# EAGLE board Board (EAGLE 9.3.0)
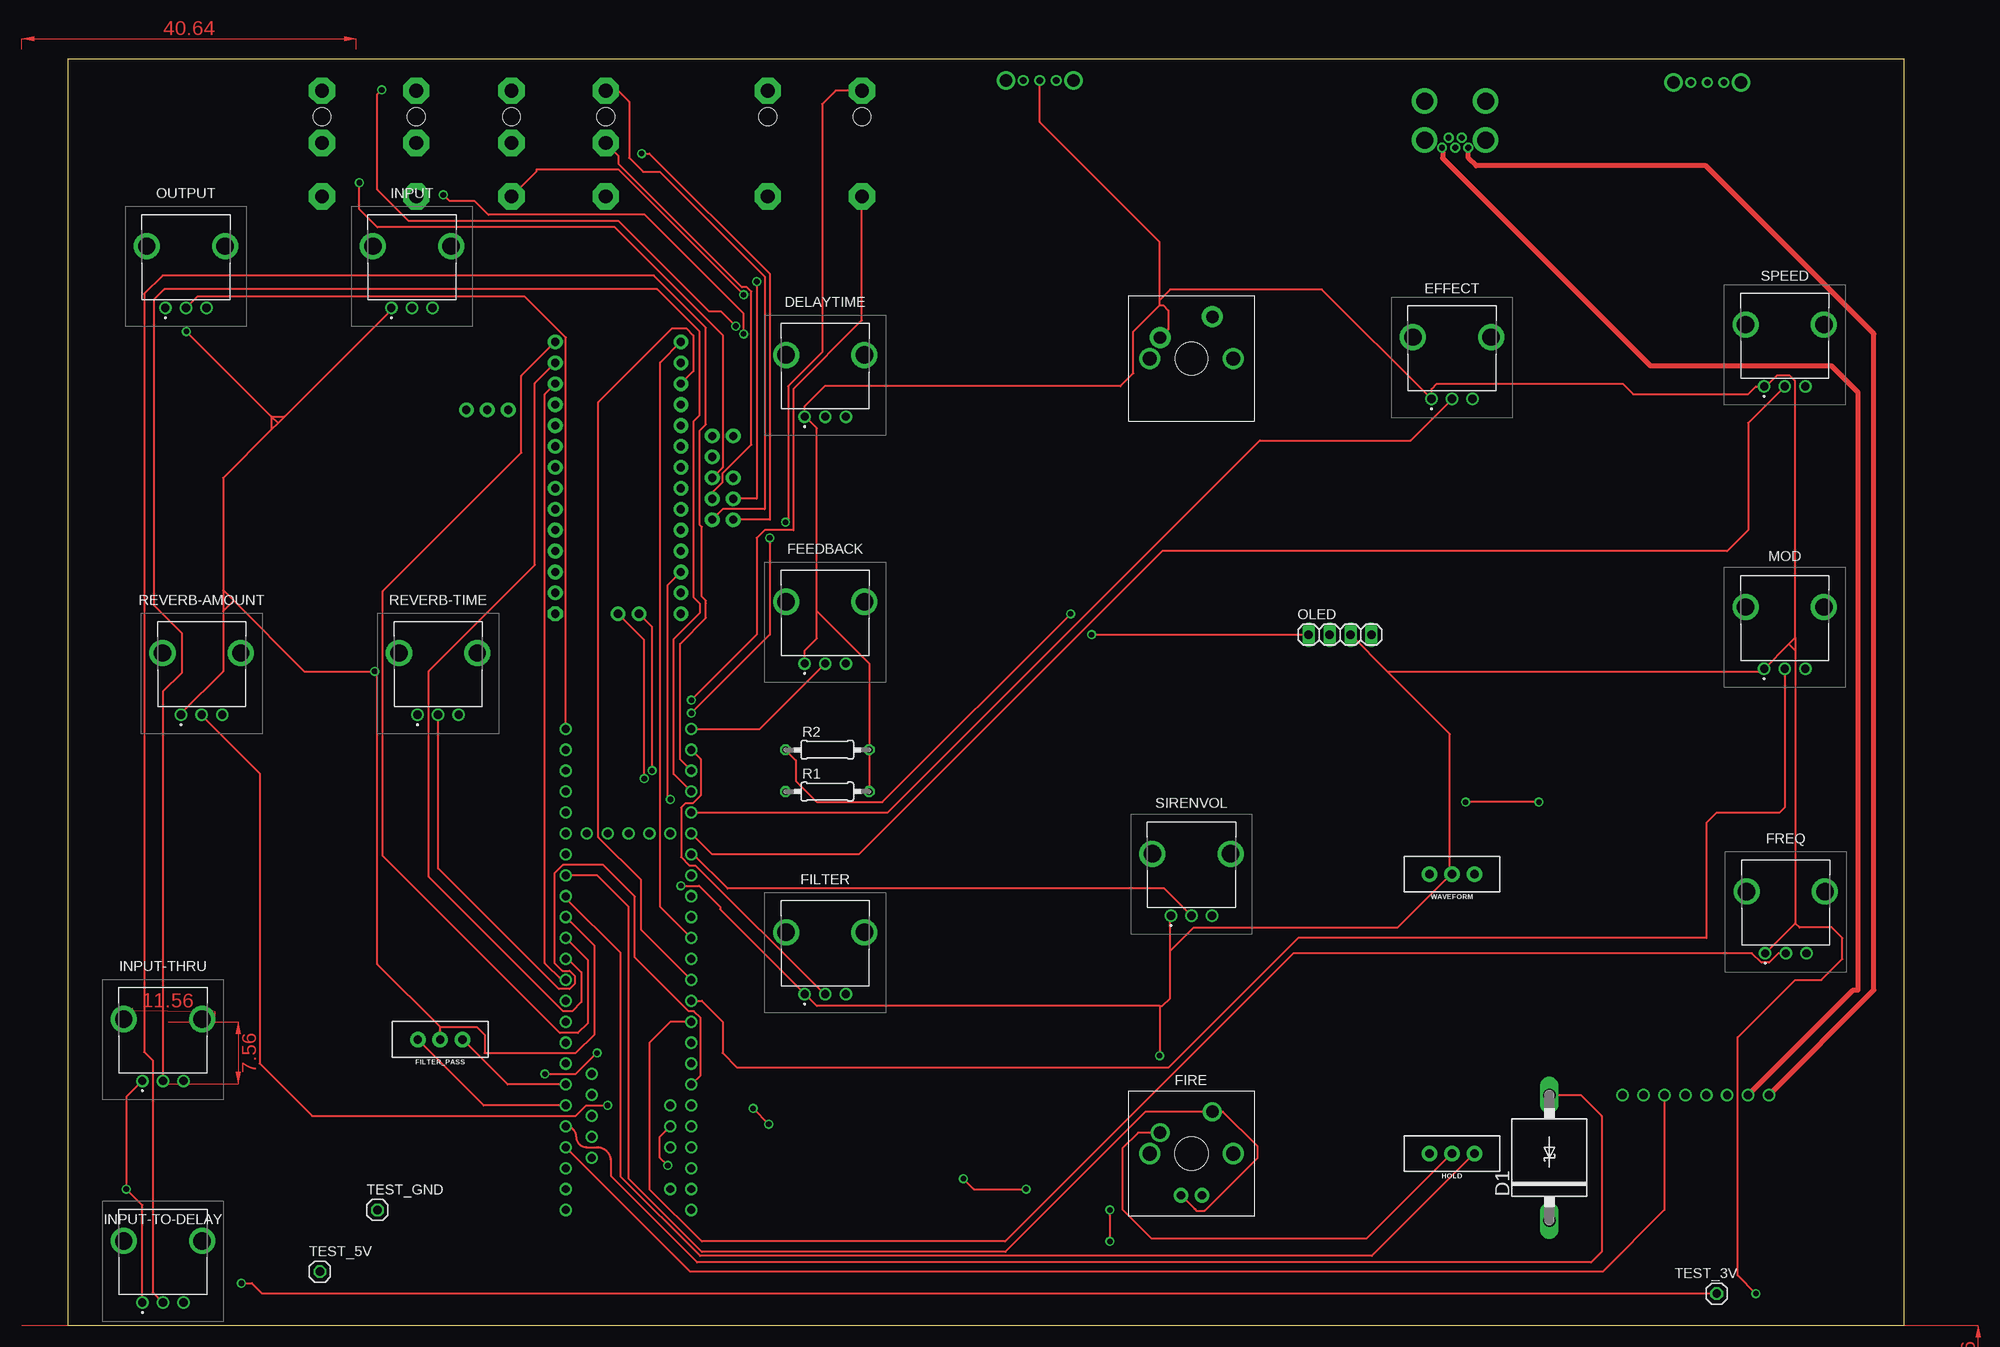
[diagram p0: board, top side]
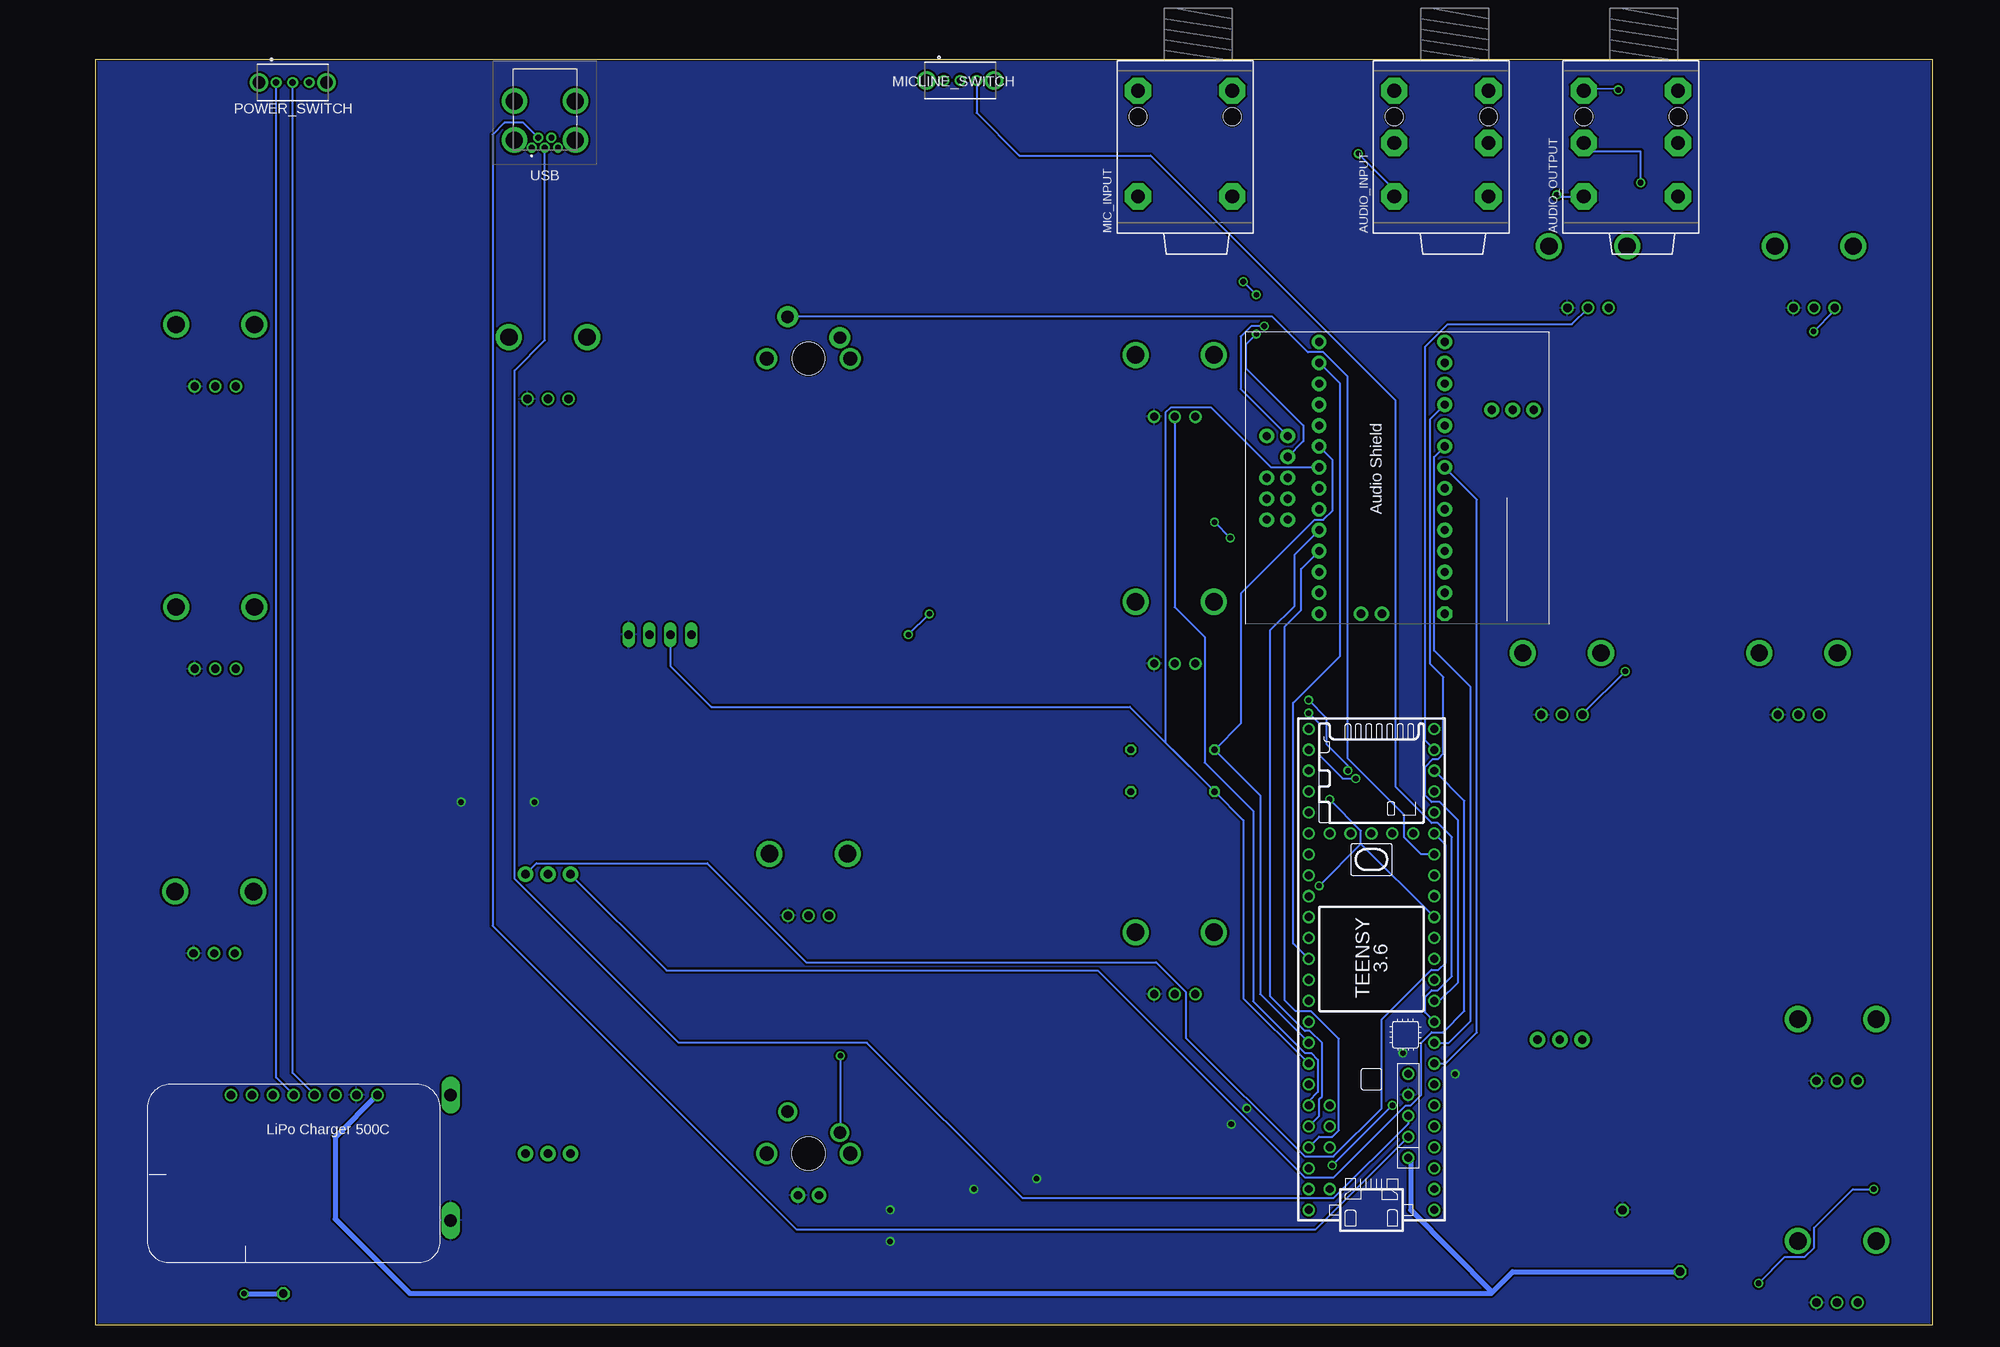
[diagram p1: board, bottom side, seen from below]

Size 222.88 x 153.67 mm. Coordinates in mm from the lower left corner, seen from the top.
Outline: 0,0 222.88,0 222.88,153.67 0,153.67 0,0
Copper layers (1*16): Top 0.035mm / dielectric 1.5mm / Bottom 0.035mm
Design rules "default *": minimum track width 3.5mil, minimum drill 0.2mm, track to track 5mil, track to pad 5mil, pad to pad 5mil, via to via 5mil, smd to smd 5mil, copper to edge 0.2mm, drill to drill 6mil, minimum pad ring 10mil, minimum via ring 8mil, stop-mask expansion 4mil, vias tented up to drill 0mil, thermal gap 10mil
Net classes: 0 default: width 0.254 mm, drill 0.686 mm, clearance 0.254 mm

## Footprints (pad centres in the part's own frame; a part is rotated, then mirrored left to right if it is on the bottom)
NRJ6HF = drill 1.676 pad 3.175 octagon: RING 2.055,7.25; RING-S 2.055,-4.18; SLEEVE 8.414,7.25; SLEEVE-S 8.414,-4.18; TIP -4.445,7.25; TIP-S -4.445,-4.18 | hole 2.184: 5.239,7.25; 5.239,-4.18
P6T15 = drill 1.499 long: A 7.62,0; C -7.62,0
RK09L1140A66 = drill 1 pad 1.5: 1 -2.5,-5.025; 2 0,-5.025; 3 2.5,-5.025 | drill 2.11 pad 3.164: 4 -4.75,2.475; 5 4.75,2.475
SWITCH_SPDT_PTH_11.6X4.0MM_LOCK = drill 1.016 pad 1.88: 1 0,2.718; 2 0,0; 3 0,-2.718
CHERRY-MX-LED = drill 1.016 pad 1.778: LED+ -1.27,-5.08; LED- 1.27,-5.08 | drill 1.714 pad 1.93: P$3 -5.08,0; P$4 5.08,0 | drill 1.524 pad 2.286: SW1 -3.81,2.54; SW2 2.54,5.08 | hole 4.064: 0,0
NRJ4HF = drill 1.676 pad 3.175 octagon: SLEEVE 8.414,7.25; SLEEVE-S 8.414,-4.18; TIP -4.445,7.25; TIP-S -4.445,-4.18 | hole 2.184: 5.239,7.25; 5.239,-4.18
OS102011MA1QN1 = drill 0.8 pad 1.3: 1 -2,0; 2 0,0; 3 2,0 | drill 1.5 pad 2.25: 4 -4.1,0; 5 4.1,0
1X04 = drill 1.016 long: 1 -3.81,0; 2 -1.27,0; 3 1.27,0; 4 3.81,0
0207/10 = drill 0.813 octagon: 1 -5.08,0; 2 5.08,0
CHERRY-MX = drill 1.714 pad 1.93: P$3 -5.08,0; P$4 5.08,0 | drill 1.5 pad 2.54: SW1 -3.81,2.54; SW2 2.54,5.08 | hole 4: 0,0
TEENSY_3.5/3.6 = drill 0.965: 0/RX -25.4,-7.62; 1/TX -22.86,-7.62; 2 -20.32,-7.62; 3/CANTX -17.78,-7.62; 3V3 7.62,-7.62; 3V3_2 17.78,-2.54; 3V3_LO -22.86,7.62; 4/CANRX -15.24,-7.62; 5 -12.7,-7.62; 6 -10.16,-7.62; 7 -7.62,-7.62; 8 -5.08,-7.62; 9/CS -2.54,-7.62; 10/CS 0,-7.62; 11/MOSI 2.54,-7.62; 12/MISO 5.08,-7.62; 13/SCK 5.08,7.62; 14/A0 2.54,7.62; 15/A1 0,7.62; 16/A2 -2.54,7.62; 17/A3 -5.08,7.62; 18/A4/SDA -7.62,7.62; 19/A5/SCL -10.16,7.62; 20/A6 -12.7,7.62; 21/A7 -15.24,7.62; 21/DAC0 12.7,7.62; 22/A8 -17.78,7.62; 23/A9 -20.32,7.62; 24 10.16,-7.62; 25 12.7,-7.62; 26 15.24,-7.62; 27 17.78,-7.62; 28 20.32,-7.62; 29 22.86,-7.62; 30 25.4,-7.62; 31/A12 27.94,-7.62; 32/A13 30.48,-7.62; 33/A14 30.48,7.62; 34/A15 27.94,7.62; 35/A16 25.4,7.62; 36/A17 22.86,7.62; 37/A18 20.32,7.62; 38/A19 17.78,7.62; 39/A20 15.24,7.62; A10 -17.78,5.08; A11 -15.24,5.08; A22/DAC1 10.16,7.62; AGND -25.4,7.62; AREF -20.32,5.08; GND -27.94,-7.62; GND2 7.62,7.62; GND3 17.78,0; PROG 17.78,2.54; RESET 17.78,5.08; U5V -21.59,-4.445; UD+ -16.51,-4.445; UD- -19.05,-4.445; UGND1 -13.97,-4.445; UGND2 -11.43,-4.445; VBAT 17.78,-5.08; VIN -27.94,7.62; VUSB -25.4,5.08
1X01 = drill 1.016 octagon: 1 0,0
POWERBOOST500 = drill 1.016: 1 10.16,20.32; 2 12.7,20.32; 3 15.24,20.32; 4 17.78,20.32; 5 20.32,20.32; 6 22.86,20.32; 7 25.4,20.32; 8 27.94,20.32
AUDIOSHIELD = drill 1 pad 1.778: 0 -13.97,-5.08; 1 -11.43,-5.08; 2 -8.89,-5.08; 3 -6.35,-5.08; 3V -11.43,10.16; 4 -3.81,-5.08; 5 -1.27,-5.08; 5V -16.51,10.16; 6 1.27,-5.08; 7 3.81,-5.08; 8 6.35,-5.08; 9 8.89,-5.08; 10 11.43,-5.08; 11 13.97,-5.08; 12 16.51,-5.08; 13 16.51,10.16; 14 13.97,10.16; 15 11.43,10.16; 16 8.89,10.16; 17 6.35,10.16; 18 3.81,10.16; 19 1.27,10.16; 20 -1.27,10.16; 21 -3.81,10.16; 22 -6.35,10.16; 23 -8.89,10.16; G -13.97,10.16; GND_MIC -16.51,2.54; INGND1 -5.08,16.51; INGND2 -2.54,16.51; INL -5.08,13.97; INR -2.54,13.97; MIC -16.51,5.08; OUTGND 2.54,13.97; OUTL 5.08,13.97; OUTR 0,13.97; UNUSED1 0,16.51; UNUSED2 5.08,16.51; VOL 8.255,-13.335; VOL_3.3V 8.255,-15.875; VOL_GND 8.255,-10.795 | drill 1 pad 1.778 octagon: GND -16.51,-5.08
XM7D0512 = drill 0.7 pad 1.2: 1 -1.6,-4.225; 2 -0.8,-3.025; 3 0,-4.225; 4 0.8,-3.025; 5 1.6,-4.225 | drill 2.062 pad 3.092: 6 -3.7,-3.325; 7 3.7,-3.325; 8 -3.7,1.425; 9 3.7,1.425

## Placement (x,y rotation side)
AUDIO_INPUT  NRJ6HF  [NRJ6HF]  58.04,141.48 90 bottom
AUDIO_OUTPUT  NRJ6HF  [NRJ6HF]  35.05,141.48 90 bottom
D1  5KPXX  [P6T15]  179.83,20.32 90 top
DELAYTIME  RK09L1140A66  [RK09L1140A66]  91.95,115.32 0 top
EFFECT  RK09L1140A66  [RK09L1140A66]  168.02,117.47 0 top
FEEDBACK  RK09L1140A66  [RK09L1140A66]  91.95,85.34 0 top
FILTER  RK09L1140A66  [RK09L1140A66]  91.95,45.21 0 top
FILTER_PASS  [SWITCH_SPDT_PTH_11.6X4.0MM_LOCK]  45.21,34.67 90 top
FIRE  CHERRY-MX-LED  [CHERRY-MX-LED]  136.4,20.83 0 top
FREQ  RK09L1140A66  [RK09L1140A66]  208.53,50.16 0 top
HOLD  [SWITCH_SPDT_PTH_11.6X4.0MM_LOCK]  168.02,20.83 90 top
INPUT  RK09L1140A66  [RK09L1140A66]  41.78,128.52 0 top
INPUT-THRU  RK09L1140A66  [RK09L1140A66]  11.56,34.67 0 top
INPUT-TO-DELAY  RK09L1140A66  [RK09L1140A66]  11.56,7.75 0 top
MIC_INPUT  NRJ4HF  [NRJ4HF]  89.15,141.48 90 bottom
MICLINE_SWITCH  OS102011MA1QN1  [OS102011MA1QN1]  117.98,151.13 0 bottom
MOD  RK09L1140A66  [RK09L1140A66]  208.41,84.71 0 top
OLED  [1X04]  154.43,83.82 0 top
OUTPUT  RK09L1140A66  [RK09L1140A66]  14.35,128.52 0 top
POWER_SWITCH  OS102011MA1QN1  [OS102011MA1QN1]  199.01,150.88 0 bottom
R1  [0207/10]  92.2,64.77 0 top
R2  [0207/10]  92.2,69.85 0 top
REVERB-AMOUNT  RK09L1140A66  [RK09L1140A66]  16.26,79.12 0 top
REVERB-TIME  RK09L1140A66  [RK09L1140A66]  44.96,79.12 0 top
SIRENVOL  RK09L1140A66  [RK09L1140A66]  136.4,54.74 0 top
SOUND  CHERRY-MX  [CHERRY-MX]  136.4,117.35 0 top
SPEED  RK09L1140A66  [RK09L1140A66]  208.41,119 0 top
TEENSY  TEENSY_3.5/3.6  [TEENSY_3.5/3.6]  68.07,41.91 90 bottom
TEST_3V  [1X01]  200.15,3.81 0 top
TEST_5V  [1X01]  30.61,6.48 0 top
TEST_GND  [1X01]  37.59,13.97 0 top
U$2  POWERBOOST500C  [POWERBOOST500]  216.66,7.62 0 bottom
U$5  [AUDIOSHIELD]  64.26,102.87 90 bottom
USB  XM7D-0512  [XM7D0512]  168.4,147.19 0 bottom
WAVEFORM  [SWITCH_SPDT_PTH_11.6X4.0MM_LOCK]  168.02,54.74 90 top

## Library data of the parts
AUDIO_INPUT AUDIO_OUTPUT MIC_INPUT = audio
D1 = diode
DELAYTIME EFFECT FEEDBACK FILTER FREQ INPUT INPUT-THRU INPUT-TO-DELAY MOD OUTPUT REVERB-AMOUNT REVERB-TIME SIRENVOL SPEED = SamacSys_Parts; DESCRIPTION: Audio potentiometer 10K Vertical 12,5mm; HEIGHT: 22mm; MANUFACTURER_NAME: ALPS; MANUFACTURER_PART_NUMBER: RK09L1140A66; MOUSER_PART_NUMBER: 688-RK09L1140A66
FILTER_PASS HOLD WAVEFORM = SparkFun-Switches; PROD_ID: SWCH-08261; SF_SKU: COM-00102
FIRE SOUND = cherrymx
MICLINE_SWITCH POWER_SWITCH = OS102011MA1QN1; ALLIED_NUMBER: 70128246; ALLIED_PRICE-STOCK: https://www.alliedelec.com/c-k-os102011ma1qn1/70128246/; DESCRIPTION: Switch Slide Right Angle SPDT 0.1A 12VDC Through Hole Slide Switch SPDT On-On 0.1 A@ 12 V dc Slide; HEIGHT: mm; MANUFACTURER_NAME: C & K COMPONENTS; MANUFACTURER_PART_NUMBER: OS102011MA1QN1; MOUSER_PART_NUMBER: 611-OS102011MA1QN1; MOUSER_PRICE-STOCK: https://www.mouser.com/Search/Refine.aspx?Keyword=611-OS102011MA1QN1; RS_PART_NUMBER: 7874855; RS_PRICE-STOCK: http://uk.rs-online.com/web/p/products/7874855
OLED TEST_3V TEST_5V TEST_GND = pinhead
R1 R2 = resistor
TEENSY = Teensy356
U$2 = jos-ph
U$5 = Teensy_Audioshield
USB = SamacSys_Parts; DESCRIPTION: OMRON ELECTRONIC COMPONENTS - XM7D-0512 - MINI USB, 2.0 TYPE B, RECEPTACLE, TH; HEIGHT: 3mm; MANUFACTURER_NAME: Omron Electronics; MANUFACTURER_PART_NUMBER: XM7D-0512; MOUSER_PART_NUMBER: 653-XM7D-0512

## Nets
3V: TEENSY.3V3_LO
BUTTON_FIRE: FIRE.LED+ FIRE.SW2 TEENSY.25
BUTTON_HOLD: HOLD.3 TEENSY.24
BUTTON_SOUND: SOUND.SW2 TEENSY.26
GND: D1.C DELAYTIME.3 EFFECT.3 FEEDBACK.3 FILTER.3 FIRE.LED- FREQ.3 INPUT-THRU.3 INPUT-TO-DELAY.3 INPUT.3 MOD.3 OLED.4 OUTPUT.3 REVERB-AMOUNT.3 REVERB-TIME.3 SIRENVOL.3 SPEED.3 TEENSY.UGND1 TEST_GND.1 U$2.7
KNOB_DELAY: DELAYTIME.2 TEENSY.21/A7
KNOB_EFFECT: EFFECT.2 TEENSY.37/A18
KNOB_FEEDBACK: FEEDBACK.2 TEENSY.33/A14
KNOB_FILTER: FILTER.2 TEENSY.34/A15
KNOB_FREQ: FREQ.2 TEENSY.17/A3
KNOB_INPUT: INPUT.2 TEENSY.31/A12
KNOB_INPUTTHRU: INPUT-THRU.2 TEENSY.36/A17
KNOB_INPUTTODELAY: INPUT-TO-DELAY.2 TEENSY.35/A16
KNOB_MOD: MOD.2 TEENSY.16/A2
KNOB_OUTPUT: OUTPUT.2 TEENSY.32/A13
KNOB_REVERBTIME: REVERB-TIME.2 TEENSY.20/A6
KNOB_REVERBVOLUME: REVERB-AMOUNT.2 TEENSY.A10
KNOB_SIRENVOL: SIRENVOL.2 TEENSY.39/A20
KNOB_SPEED: SPEED.2 TEENSY.38/A19
LED_HOLD: D1.A TEENSY.3/CANTX
N$1: U$2.1 USB.1
N$2: U$2.2 USB.5
N$3: TEENSY.UD- USB.2
N$4: TEENSY.UD+ USB.3
N$5: MIC_INPUT.SLEEVE U$5.GND_MIC
N$6: MIC_INPUT.TIP U$5.MIC
N$8: AUDIO_OUTPUT.TIP U$5.OUTGND
N$9: AUDIO_INPUT.SLEEVE U$5.INL
N$10: AUDIO_OUTPUT.RING U$5.OUTR
N$11: AUDIO_INPUT.TIP U$5.INGND1
N$12: AUDIO_INPUT.TIP-S U$5.INGND2
N$13: AUDIO_INPUT.RING U$5.INR
N$14: AUDIO_OUTPUT.SLEEVE U$5.OUTL
N$15: TEENSY.2 U$2.6
N$16: POWER_SWITCH.1 U$2.4
N$17: POWER_SWITCH.2 U$2.5
PIN4: FILTER_PASS.1 TEENSY.4/CANRX
PIN5: FILTER_PASS.3 TEENSY.5
PIN6: TEENSY.6 U$5.6
PIN7: TEENSY.7 U$5.7
PIN8: MICLINE_SWITCH.3 TEENSY.8
PIN9: TEENSY.9/CS U$5.9
PIN10: TEENSY.10/CS U$5.10
PIN11: TEENSY.11/MOSI U$5.11
PIN12: TEENSY.12/MISO U$5.12
PIN13: TEENSY.13/SCK U$5.13
PIN14: TEENSY.14/A0 U$5.14
PIN15: TEENSY.15/A1 U$5.15
PIN22: TEENSY.22/A8 U$5.22
PIN23: TEENSY.23/A9 U$5.23
PIN27: TEENSY.27 WAVEFORM.3
PIN30: TEENSY.30 WAVEFORM.1
SCL: OLED.2 R1.1 TEENSY.19/A5/SCL U$5.19
SDA: OLED.1 R2.1 TEENSY.18/A4/SDA U$5.18
TEENSY_GND: TEENSY.GND
TEST_5V: TEENSY.U5V TEST_5V.1 U$2.8
VCC: DELAYTIME.1 EFFECT.1 FEEDBACK.1 FILTER.1 FILTER_PASS.2 FIRE.SW1 FREQ.1 HOLD.2 INPUT-THRU.1 INPUT-TO-DELAY.1 INPUT.1 MICLINE_SWITCH.2 MOD.1 OLED.3 OUTPUT.1 R1.2 R2.2 REVERB-AMOUNT.1 REVERB-TIME.1 SIRENVOL.1 SOUND.SW1 SPEED.1 TEENSY.3V3 TEST_3V.1 U$5.3V WAVEFORM.2

## Tracks (layer width: path | path; a pad name or v marks a point on that pad's centre or on a via)
BUTTON_FIRE
  Top 0.254: FIRE.LED+ 136.78,14.1 136.98,13.9 137.99,13.9 144.41,20.32 144.41,21.7 140.21,25.91 FIRE.SW2 130.81,25.91 113.8,8.89 76.96,8.89 68.07,17.78 68.07,50.8 64.26,54.61 TEENSY.25
BUTTON_HOLD
  Top 0.254: HOLD.3 158.29,8.38 76.75,8.38 67.11,18.03 67.11,45.16 60.45,51.82 TEENSY.24
BUTTON_SOUND
  Bottom 0.254: TEENSY.26 62.03,57.15 64.11,59.23 64.11,61.94 70.97,68.8 70.97,115.19 73.9,118.11 75.78,118.11 80.1,122.43 SOUND.SW2
GND  (via drill 0.69)
  Top 0.254: v108.71,17.78 109.98,16.51 v116.33,16.51 | v83.19,26.29 v85.09,24.38 | v57.91,30.48 57.94,30.5 61.68,30.5 64.19,33.02 v64.26,33.02 | v126.49,13.97 v126.49,10.16 | v178.56,63.5 v169.67,63.5
  pour Bottom: -0.51,156.21 220.47,156.21 226.82,149.86 226.82,-7.62 2.03,-7.62 -3.05,-2.54 -3.05,143.51 -4.32,144.78 -4.32,152.4
KNOB_DELAY
  Bottom 0.254: TEENSY.21/A7 75.69,27.17 74.57,28.29 74.57,32.21 75.38,33.02 76.15,33.02 82.44,39.31 82.44,62.42 88.31,68.3 88.31,83.54 91.95,87.18 DELAYTIME.2
KNOB_EFFECT
  Top 0.254: TEENSY.37/A18 99.53,62.23 144.71,107.42 162.99,107.42 EFFECT.2
KNOB_FEEDBACK
  Top 0.254: TEENSY.33/A14 84.02,72.39 FEEDBACK.2
KNOB_FILTER
  Top 0.254: TEENSY.34/A15 76.81,68.73 76.81,64.31 75.85,63.35 74.97,63.35 74.45,62.82 74.45,56.81 75.46,55.8 76.18,55.8 91.8,40.19 FILTER.2
KNOB_FREQ
  Top 0.254: FREQ.2 207.64,45.14 206.5,44.01 205.56,44.01 204.43,45.14 148.77,45.14 113.79,10.16 76.96,10.16 70.61,16.51 70.61,34.29 73.15,36.83 TEENSY.17/A3
KNOB_INPUT
  Bottom 0.254: TEENSY.31/A12 61.57,70.97 61.57,118.79 58.83,121.52 43.76,121.52 INPUT.2
KNOB_INPUTTHRU
  Top 0.254: TEENSY.36/A17 73.56,66.9 73.56,83.28 76.71,86.43 76.71,87.63 75.95,88.39 75.95,109.73 76.71,110.49 76.71,120.62 71.56,125.78 11.72,125.78 10.42,124.48 10.42,87.43 13.85,84 13.85,79.19 11.56,76.9 INPUT-THRU.2
KNOB_INPUTTODELAY
  Top 0.254: TEENSY.35/A16 74.32,68.68 74.32,82.71 77.47,85.86 77.47,87.63 | INPUT-TO-DELAY.2 10.31,3.97 10.31,32.14 9.29,33.16 9.29,125.21 11.51,127.43 71.13,127.43 77.47,121.09 77.47,109.34 76.71,108.58 76.71,97.16 76.96,96.91 76.96,88.45 77.47,87.95 77.47,87.63 | 77.47,87.63
KNOB_MOD
  Top 0.254: MOD.2 208.41,62.87 207.77,62.23 200.15,62.23 198.88,60.96 198.88,46.99 149.35,46.99 133.6,31.24 81.28,31.24 79.5,33.02 79.5,36.83 76.96,39.37 TEENSY.16/A2
KNOB_OUTPUT
  Top 0.254: TEENSY.32/A13 60.45,119.91 55.47,124.89 15.74,124.89 OUTPUT.2
KNOB_REVERBTIME
  Top 0.254: TEENSY.20/A6 76.81,30.33 76.81,37.29 76,38.1 75.38,38.1 68.84,44.64 68.84,52.02 65.01,55.85 60.12,55.85 59.08,54.82 59.08,43.99 60.04,43.03 60.91,43.03 61.57,42.37 61.57,41.45 60.91,40.79 59.61,40.79 44.96,55.44 REVERB-TIME.2
KNOB_REVERBVOLUME  (via drill 0.69)
  Top 0.254: TEENSY.A10 71.88,22.86 71.88,20.32 v72.83,19.37 | v65.53,26.67 62.93,26.67 61.66,25.4 29.65,25.4 23.3,31.75 23.3,66.99 16.32,73.98 REVERB-AMOUNT.2
  Bottom 0.254: v65.53,26.67 v72.83,19.37
KNOB_SIRENVOL
  Top 0.254: SIRENVOL.2 133.12,52.99 80.1,52.99 75.95,57.15 TEENSY.39/A20
KNOB_SPEED
  Top 0.254: SPEED.2 203.96,109.53 203.96,96.52 201.42,93.98 132.84,93.98 96.01,57.15 78.23,57.15 TEENSY.38/A19
LED_HOLD
  Top 0.254: D1.A 183.64,27.94 186.18,25.4 186.18,8.89 184.91,7.62 76.38,7.62 65.91,18.09 65.91,19.94 arc90 64.26,21.59 62.99,21.59 arc-90 61.72,22.86 arc90 TEENSY.3/CANTX
N$1
  Top 0.61: U$2.1 219.24,40.67 219.24,120.35 198.83,140.76 170.94,140.76 170,141.7 USB.1
N$2
  Top 0.61: U$2.2 216.66,40.64 217.3,40.64 217.3,113.25 214.1,116.45 192.13,116.45 166.88,141.7 166.88,142.88 USB.5
N$3
  Bottom 0.254: TEENSY.UD- 74.91,11.58 137.84,11.58 174.73,48.48 174.73,144.56 173.31,145.98 171.01,145.98 USB.2
N$4
  Bottom 0.254: TEENSY.UD+ 63.63,24.45 72.69,15.39 110.42,15.39 129.31,34.27 152.14,34.27 172.06,54.19 172.06,115.91 168.4,119.57 USB.3
N$5  (via drill 0.69)
  Top 0.254: U$5.GND_MIC 69.98,83.19 v69.98,66.36 | v75.69,74.3 85.22,83.82 v85.22,95.57 | v87.12,97.47 87.44,97.79 87.44,113.98 91.57,118.11 91.57,148.24 93.22,149.89 MIC_INPUT.SLEEVE
  Bottom 0.254: v69.98,66.36 71.56,66.36 74.42,69.22 74.42,73.03 v75.69,74.3 | v87.12,97.47 v85.22,95.57
N$6  (via drill 0.69)
  Top 0.254: U$5.MIC 70.93,84.77 v70.93,67.31 | v75.69,75.88 83.63,83.82 83.63,95.57 84.58,96.52 88.08,96.52 88.08,113.67 96.4,122 MIC_INPUT.TIP
  Bottom 0.254: v70.93,67.31 70.93,67.94 73.53,70.55 73.53,73.72 v75.69,75.88
N$8  (via drill 0.69)
  Top 0.254: v82.04,120.33 82.04,122.81 70.04,134.81 51.05,134.81 49.39,136.47 46.34,136.47 v45.58,137.23
  Bottom 0.254: U$5.OUTGND 76.33,107.31 76.33,109.22 83.31,116.2 83.31,119.06 v82.04,120.33 | v45.58,137.23 45.38,137.03 AUDIO_OUTPUT.TIP
N$9
  Top 0.254: U$5.INL 79.5,99.06 84.58,99.06 84.58,127.32 71.88,140.02 69.85,140.02 68.14,141.73 68.14,148.53 66.8,149.86 65.32,149.86 AUDIO_INPUT.SLEEVE
N$10  (via drill 0.69)
  Top 0.254: U$5.OUTR 79.5,104.14 79.5,120.21 66.42,133.29 37.59,133.29 35.41,135.47 v35.41,138.71
  Bottom 0.254: v35.41,138.71 35.41,142.52 41.29,142.52 AUDIO_OUTPUT.RING
N$11  (via drill 0.69)
  Top 0.254: U$5.INGND1 85.22,97.79 85.22,127.64 70.61,142.24 v69.66,142.24
  Bottom 0.254: v69.66,142.24 64.92,137.5 AUDIO_INPUT.TIP
N$12  (via drill 0.69)
  Top 0.254: U$5.INGND2 83.63,100.33 v83.63,126.68 | v82.04,125.09 66.8,140.34 56.9,140.34 56.9,140.07 AUDIO_INPUT.TIP-S
  Bottom 0.254: v82.04,125.09 v83.63,126.68
N$13
  Top 0.254: U$5.INR 78.23,101.07 79.5,102.34 79.5,103.42 82.97,106.89 82.97,125.48 82.43,126.02 81.83,126.02 66.84,141.01 66.84,141.98 AUDIO_INPUT.RING
N$14  (via drill 0.69)
  Top 0.254: v38.11,149.97 37.59,149.46 37.59,137.86 41.4,134.05 66.86,134.05 77.85,123.06 79.31,123.06 v81.09,121.28
  Bottom 0.254: U$5.OUTL 83.95,113.67 83.95,120.02 82.68,121.28 v81.09,121.28 | v38.11,149.97 38.25,150.11 42.03,150.16 AUDIO_OUTPUT.SLEEVE
N$15
  Top 0.254: U$2.6 193.8,13.97 186.31,6.48 75.56,6.48 TEENSY.2
N$16
  Bottom 0.254: U$2.4 201.01,30.07 POWER_SWITCH.1
N$17
  Bottom 0.254: U$2.5 199.01,30.61 POWER_SWITCH.2
PIN4
  Top 0.254: TEENSY.4/CANRX 50.49,26.67 FILTER_PASS.1
PIN5
  Top 0.254: TEENSY.5 53.39,29.21 FILTER_PASS.3
PIN6
  Bottom 0.254: TEENSY.6 59.05,31.75 55.27,35.53 55.27,100.23 U$5.6
PIN7
  Bottom 0.254: TEENSY.7 58.67,34.29 56.03,36.93 56.03,77.48 60.45,81.9 60.45,105.41 U$5.7
PIN8
  Bottom 0.254: TEENSY.8 61.57,37.95 61.57,39.83 60.76,40.64 60.01,40.64 58.32,42.34 58.32,59.26 60.01,60.96 60.76,60.96 65.14,65.34 65.14,112.27 94.87,142 110.79,142 115.98,147.19 MICLINE_SWITCH.3
PIN9
  Bottom 0.254: TEENSY.9/CS 59.82,39.37 57.56,41.63 57.56,61.3 59.76,63.5 60.76,63.5 61.57,64.31 61.57,67.77 60.61,68.73 59.99,68.73 59.33,69.39 59.33,78.66 60.96,80.28 60.96,109.98 U$5.9
PIN10
  Top 0.254: TEENSY.10/CS 59.94,41.91 57.91,43.94 57.91,113.03 U$5.10
PIN11
  Top 0.254: TEENSY.11/MOSI 60.71,44.45 62.33,42.82 62.33,39.22 61.21,38.1 60.14,38.1 43.82,54.42 43.82,79.41 56.7,92.28 56.7,114.36 U$5.11
PIN12
  Top 0.254: TEENSY.12/MISO 63.09,44.35 63.09,36.62 61.93,35.46 59.73,35.46 38.24,56.95 38.24,89.12 55.05,105.93 55.05,115.25 U$5.12
PIN13
  Top 0.254: TEENSY.13/SCK 71.91,50.77 71.91,116.86 U$5.13
PIN14
  Bottom 0.254: TEENSY.14/A0 77.57,46.33 77.57,75.56 71.88,81.25 71.88,114.3 U$5.14
PIN15
  Top 0.254: TEENSY.15/A1 69.61,47.99 69.61,54.03 64.41,59.23 64.41,112.06 73.39,121.03 75.08,121.03 75.95,120.16 75.95,115.82 U$5.15
PIN22
  Bottom 0.254: TEENSY.22/A8 74.42,25.4 74.42,27.44 74.07,27.8 74.07,34.24 75.53,35.71 76.16,35.71 80.37,39.92 80.37,84.36 77.4,87.33 77.4,93.54 U$5.22
PIN23
  Bottom 0.254: TEENSY.23/A9 74.42,22.86 72.84,22.86 72.03,23.67 72.03,34.75 75.38,38.1 77.27,38.1 78.59,39.41 78.59,84.83 76.6,86.82 76.6,91.8 U$5.23
PIN27
  Bottom 0.254: WAVEFORM.3 169.42,56.06 148.68,56.06 136.68,44.06 94.21,44.06 90.58,40.43 90.58,34.9 76.16,20.47 72.69,20.47 66.85,26.31 66.85,37.09 60.81,43.13 59.93,43.13 59.08,43.99 59.08,58.32 TEENSY.27
PIN30
  Bottom 0.254: WAVEFORM.1 153.61,43.04 101.26,43.04 76.16,17.93 72.67,17.93 63.94,26.67 63.32,26.67 62.04,27.95 62.04,34.28 60.76,35.56 59.38,35.56 56.79,38.15 56.79,63.65 TEENSY.30
SCL
  Bottom 0.254: R1.1 83.62,61.27 83.62,39.68 TEENSY.19/A5/SCL | U$5.19 80.24,104.14 87.53,111.43 92.42,111.43 93.08,110.76 93.08,70.73 R1.1 | OLED.2 153.16,80.01 148.2,75.05 97.4,75.05 R1.1
SDA  (via drill 0.69)
  Top 0.254: v124.27,83.82 OLED.1 | v121.73,86.36 98.87,63.5 90.93,63.5 88.39,66.04 88.39,68.58 R2.1
  Bottom 0.254: TEENSY.18/A4/SDA 81.59,40.19 81.59,64.32 R2.1 83.88,73.09 83.88,88.86 74.95,97.79 73.9,97.79 72.77,98.92 72.77,105.03 U$5.18 | v121.73,86.36 v124.27,83.82
TEST_5V
  Bottom 0.61: U$2.8 193.85,22.81 193.85,12.9 184.77,3.81 53.59,3.81 53.44,3.96 | TEENSY.U5V 63.31,20.01 63.31,13.97 53.44,3.96 | 53.44,3.96 50.93,6.48 TEST_5V.1
VCC  (via drill 0.69)
  Top 0.254: R1.2 R2.2 97.28,80.33 90.93,86.68 | 90.93,86.68 90.93,83.38 89.45,81.89 FEEDBACK.1 | 90.93,86.68 90.93,108.9 89.66,110.17 DELAYTIME.1 89.41,110.33 89.41,111.51 91.89,113.98 127.76,113.98 129.35,115.57 129.35,120.65 132.52,123.83 | MICLINE_SWITCH.2 117.98,146.05 132.52,131.51 132.52,124.46 | 132.52,123.83 132.52,124.46 | TEST_3V.1 23.62,3.81 22.35,5.08 v21.08,5.08 | 18.86,89.22 18.86,102.87 24.73,108.74 | 18.86,89.22 18.86,86.68 | 18.86,86.68 18.86,79.38 13.78,74.3 REVERB-AMOUNT.1 | 26.32,110.33 39.18,123.19 INPUT.1 | 26.32,110.33 25.53,109.54 | 25.53,109.54 24.73,108.74 | 25.53,109.54 24.73,110.33 | 24.73,110.33 v14.41,120.65 | TEENSY.3V3 63.94,46.04 63.94,35.31 61.66,33.02 50.61,33.02 50.61,35.24 49.66,36.2 45.21,36.2 | FILTER_PASS.2 45.21,36.2 | U$5.3V 72.77,89.79 72.77,64.2 v73.15,63.82 | 45.21,36.2 37.59,43.81 37.59,79.06 v37.27,79.38 28.7,79.38 20.13,87.95 | 209.68,83.45 209.68,81.92 | 209.68,81.92 209.68,48.78 | 160.15,79.38 167.77,71.75 167.77,54.93 WAVEFORM.2 167.77,54.61 161.42,48.26 136.65,48.26 133.79,45.4 | 160.15,79.38 OLED.3 | 160.15,79.38 205.87,79.38 MOD.1 208.91,82.68 | FIRE.SW1 129.92,23.37 128.08,21.53 128.08,13.97 131.57,10.48 157.61,10.48 167.77,20.64 HOLD.2 | 132.52,38.73 132.84,38.73 133.79,39.69 133.79,45.4 | 132.52,38.73 90.93,38.73 89.66,40.01 FILTER.1 89.34,40.32 79.18,50.48 79.18,50.8 76.64,53.34 v74.42,53.34 | SIRENVOL.1 133.79,49.53 133.79,45.4 | 132.52,38.73 v132.52,32.7 | v204.91,3.81 202.69,6.03 202.69,34.94 209.66,41.91 212.85,41.91 215.39,44.45 215.39,46.99 214.12,48.26 210.2,48.26 209.68,48.78 | SOUND.SW1 133.6,120.9 133.6,123.19 132.97,123.83 132.52,123.83
  Top 0.254: 132.52,124.46 133.79,125.73 152.21,125.73 165.23,112.71 EFFECT.1 165.54,112.71 165.54,113.67 166.18,114.3 188.72,114.3 189.99,113.03 203.96,113.03 204.91,113.97 SPEED.1 206.19,113.98 207.45,115.25 209.04,115.25 209.68,114.62 209.68,83.45 | 208.91,82.68 209.68,83.45 | 20.13,87.95 18.86,89.22 | 24.73,110.33 26.32,110.33 | 24.73,110.33 24.73,108.74 | 20.13,87.95 18.86,86.68 | 208.91,82.68 209.68,81.92 | FREQ.1 209.68,48.78 | INPUT-TO-DELAY.1 9.06,14.56 v7.11,16.51 7.11,27.7 INPUT-THRU.1
  Bottom 0.254: v37.27,79.38 42.35,74.3 REVERB-TIME.1 | v14.41,120.65 11.87,123.19 OUTPUT.1 | v73.15,63.82 69.34,60.01 69.34,58.42 | TEENSY.3V3 69.34,58.42 | v132.52,32.7 132.52,23.5 FIRE.SW1 | v74.42,53.34 69.34,58.42 | v7.11,16.51 9.65,16.51 14.34,11.82 14.34,9.41 15.49,8.26 17.9,8.26 v21.08,5.08
  Bottom 0.61: v204.91,3.81 TEST_3V.1
(copper drawn outside any net)
  shapes: Top area x4